# Altium PCB 16614.PcbDoc
Units mil, origin at the board's own origin, x right, y up, seen from the top; angles counter-clockwise.
Board outline 7074.92 x 750 mil, 2 copper layers (Top Layer, Bottom Layer), stack 61.2 mil thick; 4 components, 2 nets, 14 pads, 0 vias.
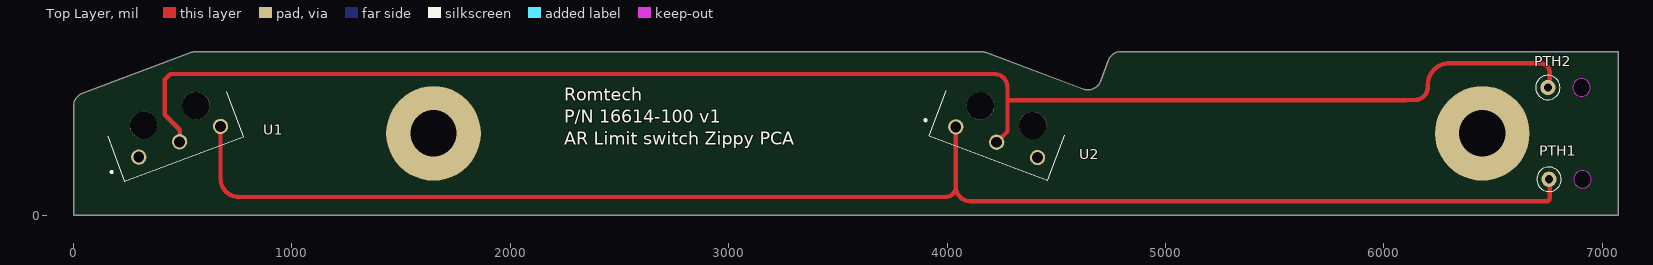
[diagram p0: Top Layer view]
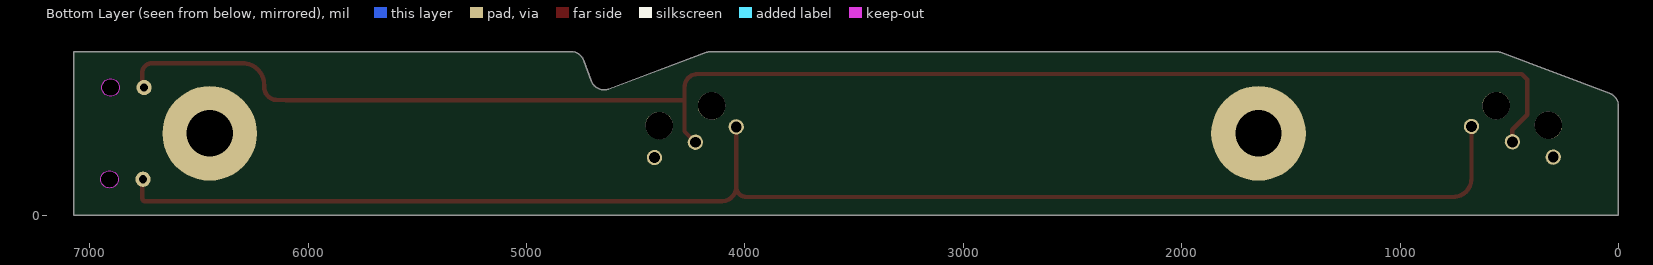
[diagram p1: Bottom Layer view, seen from below]

## Layer stack, top to bottom
Top Solder: solder mask 0.4, Solder Resist, Dk 3.5
Top Layer: signal copper 1.4
Dielectric 1: dielectric 58.4, FR-4, Dk 4.8
Bottom Layer: signal copper 1.4
Bottom Solder: solder mask 0.4, Solder Resist, Dk 3.5

## Board outline
0,0 0,500.01 cw(c62.5,500.01) 40.54,558.52 540.15,746.02 cw(c562.11,687.5) 562.11,750 4154.64,750 cw(c4154.64,687.5) 4176.6,746.02 4623.12,578.44 ccw(c4645.08,636.96) 4703.6,615 4739.05,709.46 cw(c4797.56,687.5) 4797.56,750 7074.92,750 7074.92,0
cut-out: 6870.35,164.88 ccw(c6910.35,164.88) 6910.35,124.88 ccw(c6910.35,164.88) 6950.35,164.88 ccw(c6910.35,164.88) 6910.35,204.88 ccw(c6910.35,164.88)
cut-out: 6865.34,585.24 ccw(c6905.34,585.24) 6905.34,545.24 ccw(c6905.34,585.24) 6945.34,585.24 ccw(c6905.34,585.24) 6905.34,625.24 ccw(c6905.34,585.24)

## Design rules (kind name [scope] priority, off if disabled: settings)
Clearance [All] p1: gap=10 ignorepadtopadclearanceinfootprint=FALSE except(0: Arc-Hole Track-Hole SMDPad-Hole THPad-Hole Via-Hole Fill-Hole Poly-Hole Region-Hole Text-Hole)
PolygonConnect [All] p1: connectstyle=Relief reliefconductorwidth=10 reliefentries=4 polygonreliefangle="90 Angle" airgapwidth=10
RoutingVias [All] p1: holewidth=28 width=50 viastyle="Through Hole" minholewidth=28 minwidth=50 maxholewidth=28 maxwidth=50
SolderMaskExpansion [All] p1: expansion=4 istentingtop=FALSE
Width [All] p1: maxlimit=30 minlimit=10 preferedwidth=20
30 further rules are at their usual default settings.

## Components (designator, comment, footprint, x,y, rotation, side; value= is the part's Value field where it differs from the comment)
PTH1 "Plated through hole" PTH_70MIL 6756.8,165 r90 top
PTH2 "Plated through hole" PTH_70MIL 6751.8,585.24 r90 top
U1 "DM-03S-25C-A-Z" DM-03S-25C-A-Z 298.61,266.43 r20.57 top
U2 "DM-03S-25D-A-Z" DM-03S-25D-A-Z 4040.23,405.06 r339.43 top

## Footprints (in the part's own frame and the unit in brackets; to place one, negate y for a bottom-side part, rotate by r counter-clockwise, add the part's x,y. Pads: shape width x height; smd on the part's side, far side on the other; paste and mask are expansions set on the pad)
DM-03S-25C-A-Z [mm] "left roller switch"
  round 1.778 hole 1.27 paste+0: COM(10.16,0) NC(0,0) NO(5.08,0)
  round 3.2 hole 3.2 unplated paste+0: ""(1.83,3.278) ""(8.33,3.278)
  silkscreen extent -3.67,-2.03 12.19,3.56, body extent -1.88,-0.32 11.43,16.05, height 5.76
DM-03S-25D-A-Z [mil]
  round 70 hole 50 paste+0: COM(0,0) NC(400,0) NO(200,0)
  round 125.98 hole 125.98 unplated paste+0: ""(71.76,129.54) ""(327.67,129.54)
  silkscreen extent -144,-80 480,140, body extent -52,-12 472,632, height 229
PTH_70MIL [mil]
  round 70 hole 37.8 paste+0: 1(0,0)
  silkscreen extent -56,-56 56,56

## Part data
PTH1 PTH2: library part PTH, "Plated Through Hole"
U1: library part Component_1, "Roller switch left", Manufacturer 1=Zippy, Manufacturer Part Number 1=DM-03S-25C-A-Z
U2: library part Component_1, "Roller switch right", Manufacturer 1=Zippy, Manufacturer Part Number 1=DM-03S-25C-A-Z

## Free pads (board coordinates)
  round 433.07 hole 212.6: 1(1648.46,375) 2(6451.61,375)

## Nets (pads, with @x,y where several pads share a name; then routed paths per layer and width w, separated by ;. In a path a pad name is that pad's centre, name@x,y a point inside that pad or via, vN(x,y) a via of type N, cw(c..) or ccw(c..) an arc to the next point about the centre after c; other vN are vias at no path point)
NetPTH1_1: PTH1.1 U1.COM U2.COM | length 6808.8
  Top Layer w20: U1.COM 673.1,168.43 ccw(c757.53,168.43) 757.53,84 810.25,84 3994,84 ccw(c3994,130.23) 3994.06,84 ccw(c3994,130.23) 4040.23,130.23 ; U2.COM 4040.23,130.23 ; PTH1.1 cw(c6756.8,161.8) 6760,161.8 6760,77 cw(c6748,77) 6748,65 4105.46,65 cw(c4105.46,130.23) 4040.23,130.23
NetPTH2_1: PTH2.1 U1.NO U2.NO | length 7175.7
  Top Layer w20: U1.NO@476.29,346.27 U1.NO ; U1.NO@485.85,346.27 485.85,392.15 418,460 418,622 443,647 4217.01,647 cw(c4217.01,587.01) 4277,587.01 4277,526.43 ; U2.NO 4277,384.31 4277,526.43 ; PTH2.1 ccw(c6751.8,594.44) 6761,594.44 6761,651 ccw(c6715,651) 6715,697 6302,697 ccw(c6302,597) 6202,597 6202,588 cw(c6142,588) 6142,528 6103,528 cw(c6099.22,531.78) 6099.22,526.43 4277,526.43
pads on no net: U1. U1.NC U2. U2.NC

## Silkscreen, mask and mechanical layers (free items; w line width, h text height)
Top Overlay:
  text "Romtech / P/N 16614-100 v1 / AR Limit switch Zippy PCA" at 2247,303 h100
Mechanical 1:
  drawing of 195 lines, arcs and shapes, not listed
Board_Outline:
  the board outline again, w0.5